# EAGLE board PIC32 (EAGLE 8.1.0)
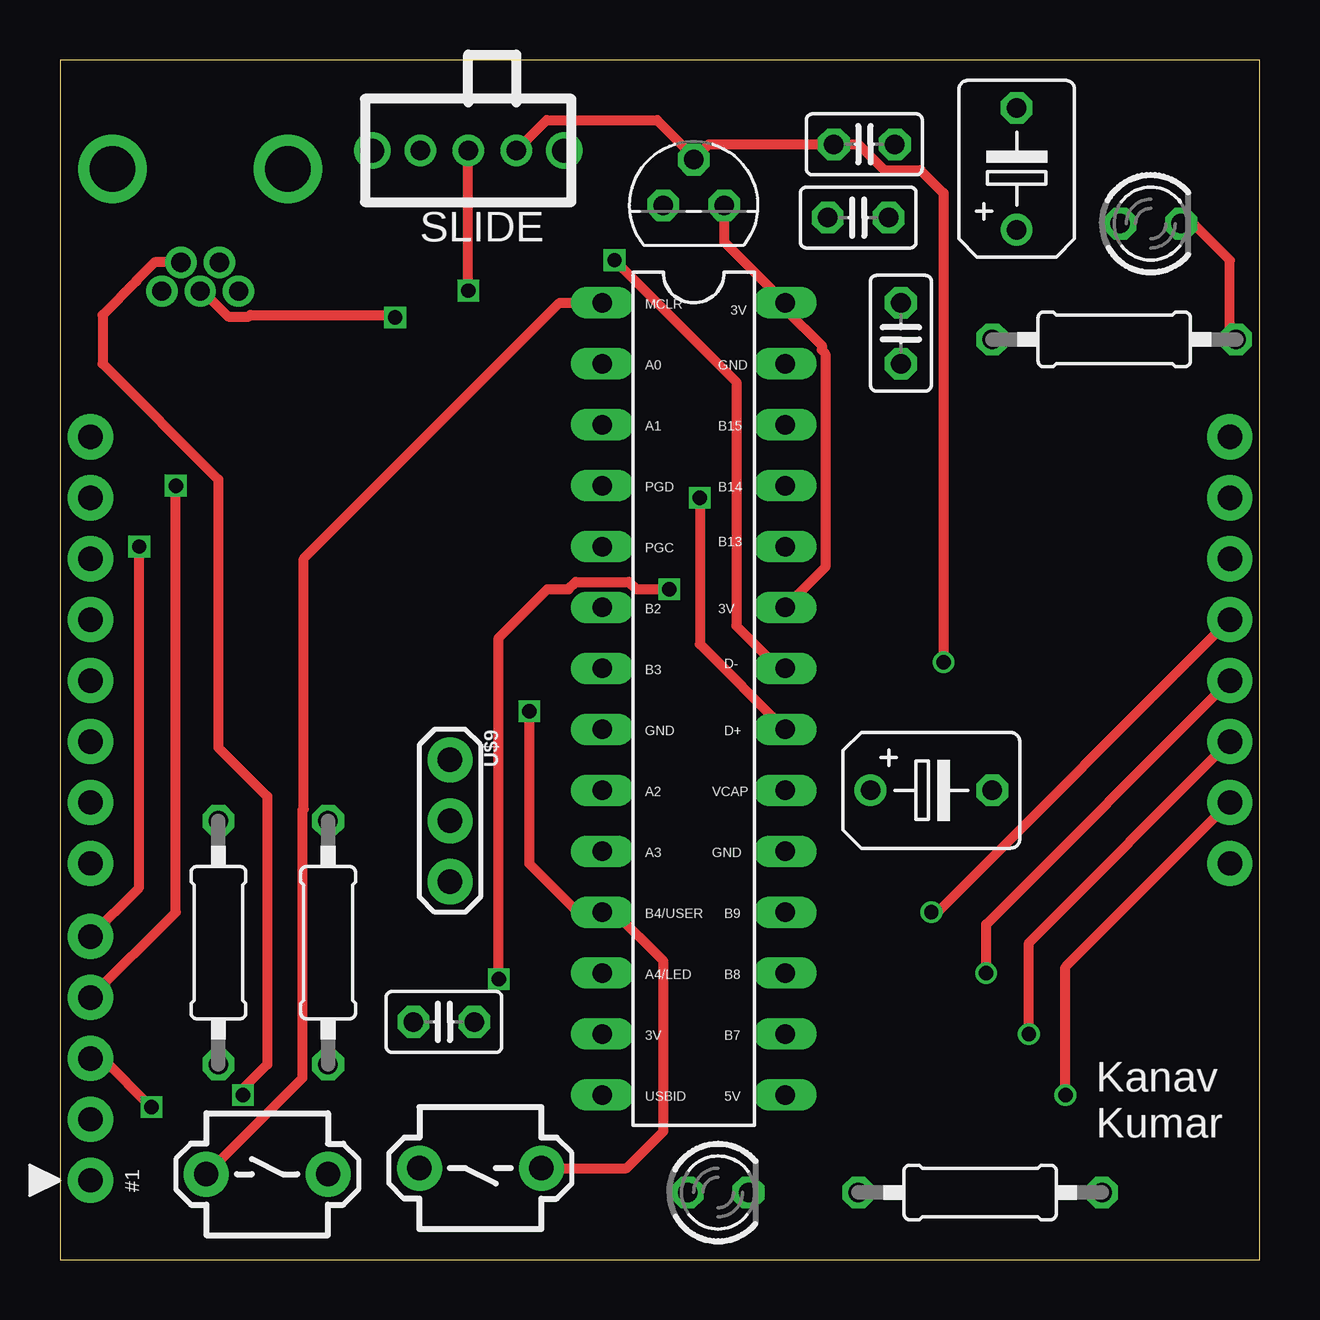
[diagram p0: board, top side]
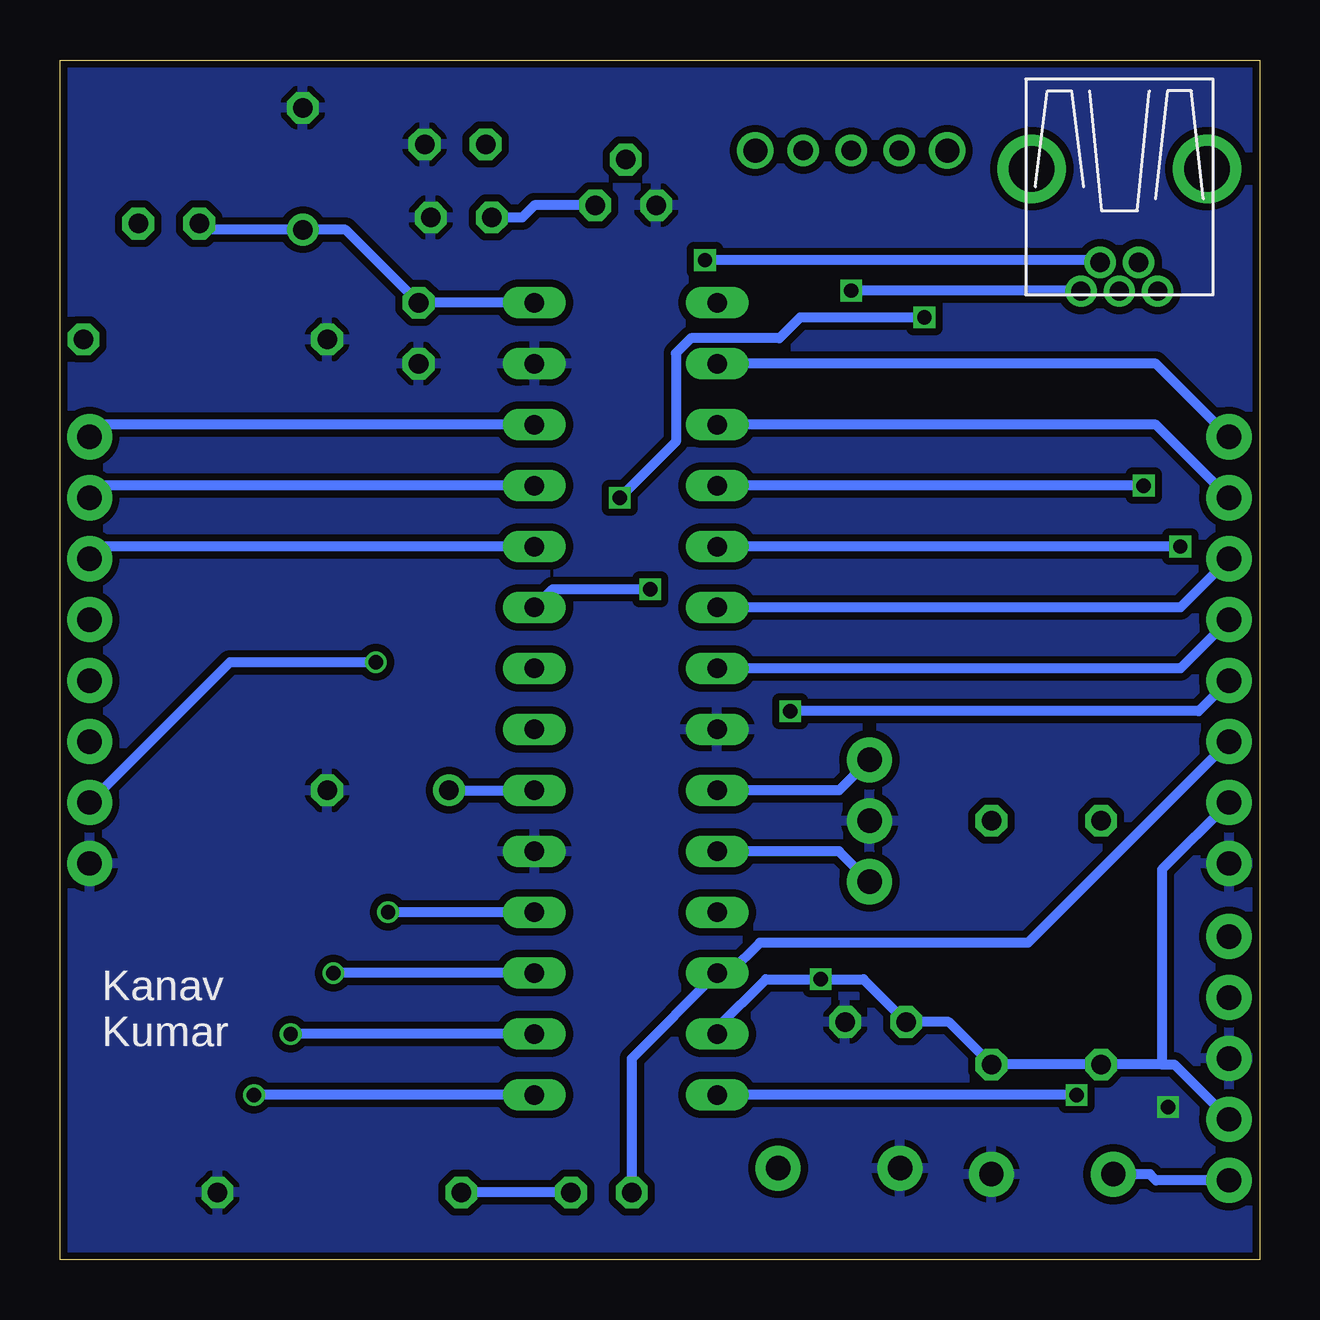
[diagram p1: board, bottom side, seen from below]

Size 50 x 50 mm. Coordinates in mm from the lower left corner, seen from the top.
Outline: 0,0 50,0 50,50 0,50 0,0
Copper layers (1*16): Top 0.035mm / dielectric 1.5mm / Bottom 0.035mm
Design rules "SeeedStudio_2layer_DRU_no_angle_20140221": minimum track width 6mil, minimum drill 12mil, track to track 6mil, track to pad 6mil, pad to pad 6mil, via to via 6mil, smd to smd 0mil, copper to edge 10mil, drill to drill 10mil, minimum pad ring 10mil, minimum via ring 6mil, stop-mask expansion 2mil, vias tented up to drill 100mil, thermal gap 10mil

## Footprints (pad centres in the part's own frame; a part is rotated, then mirrored left to right if it is on the bottom)
C025-025X050 = drill 0.813 octagon: 1 -1.27,0; 2 1.27,0
B45181B = drill 0.813: + -2.54,0 | drill 0.813 octagon: - 2.54,0
USB-MB-H = drill 0.8: D+ 5.1,0; D- 3.9,0.8; GND 5.1,-1.6; ID 3.9,-0.8; VBUS 5.1,1.6 | drill 1.9: P$6 0,-3.65; P$7 0,3.65
LED3MM = drill 0.813 octagon: A -1.27,0; K 1.27,0
0207/10 = drill 0.813 octagon: 1 -5.08,0; 2 5.08,0
DIL28-3 = drill 0.813 long: 1 -16.51,-3.81; 2 -13.97,-3.81; 3 -11.43,-3.81; 4 -8.89,-3.81; 5 -6.35,-3.81; 6 -3.81,-3.81; 7 -1.27,-3.81; 8 1.27,-3.81; 9 3.81,-3.81; 10 6.35,-3.81; 11 8.89,-3.81; 12 11.43,-3.81; 13 13.97,-3.81; 14 16.51,-3.81; 15 16.51,3.81; 16 13.97,3.81; 17 11.43,3.81; 18 8.89,3.81; 19 6.35,3.81; 20 3.81,3.81; 21 1.27,3.81; 22 -1.27,3.81; 23 -3.81,3.81; 24 -6.35,3.81; 25 -8.89,3.81; 26 -11.43,3.81; 27 -13.97,3.81; 28 -16.51,3.81
SLIDE = drill 0.8: 1 -2,0; 2 0,0; 3 2,0 | drill 1: P$1 -4,0; P$2 4,0
TO92 = drill 0.813 octagon: 1 -1.27,0; 2 0,1.905; 3 1.27,0
PB = drill 1.016 pad 1.88: 1 -2.54,0; 2 2.54,0
1X08 = drill 1.016 pad 1.88: 1 0,0; 2 2.54,0; 3 5.08,0; 4 7.62,0; 5 10.16,0; 6 12.7,0; 7 15.24,0; 8 17.78,0
1X05 = drill 1.016 pad 1.88: 1 0,0; 2 2.54,0; 3 5.08,0; 4 7.62,0; 5 10.16,0
OSC = drill 1.016 pad 1.88: 1 -2.54,0; 2 0,0; 3 2.54,0

## Placement (x,y rotation side)
C1  .1uF  [C025-025X050]  35.05,38.61 270 top
C2  .1uF  [C025-025X050]  16,9.91 0 top
C3  .1uF  [C025-025X050]  33.53,46.48 0 top
C4  .1uF  [C025-025X050]  33.27,43.43 0 top
C5  10uF  [B45181B]  36.32,19.56 0 top
C6  10uF  [B45181B]  39.88,45.47 90 top
J1  USB-MB-H  [USB-MB-H]  5.84,45.47 270 top
LED1  RED  [LED3MM]  45.47,43.18 0 top
LED2  GREEN  [LED3MM]  27.43,2.79 0 top
R1  330  [0207/10]  43.94,38.35 0 top
R2  330  [0207/10]  38.35,2.79 180 top
R3  10k  [0207/10]  6.6,13.21 90 top
R4  10k  [0207/10]  11.18,13.21 90 top
U$1  PIC32MX250F128B  [DIL28-3]  26.42,23.37 270 top
U$2  SLIDE  [SLIDE]  17.02,46.23 0 top
U$3  MCP1702  [TO92]  26.42,43.94 0 top
U$4  RESET  [PB]  17.53,3.81 180 top
U$5  USER  [PB]  8.64,3.56 0 top
U$6  CONN_8  [1X08]  48.77,16.51 90 top
U$7  CONN_8  [1X08]  1.27,16.51 90 top
U$8  PICKIT3  [1X05]  1.27,3.3 90 top
U$9  8MHz  [OSC]  16.26,18.29 270 top

## Library data of the parts
C1-C6 J1 R1-R4 U$1-U$9 = ME433
LED1 LED2 = led

## Nets
+3V3: C1.1 C2.1 C4.1 C6.+ LED1.A R3.1 R4.1 U$1.13 U$1.23 U$1.28 U$3.3 U$7.2 U$8.2
+5V: C3.1 U$1.15 U$2.3 U$3.2 U$6.2
A0: U$1.2 U$7.8
A1: U$1.3 U$7.7
A4/LED: LED2.A U$1.12 U$7.3
B2: U$1.6 U$7.6
B3: U$1.7 U$7.5
B4/USER: U$1.11 U$4.1 U$7.4
B7: U$1.16 U$6.3
B8: U$1.17 U$6.4
B9: U$1.18 U$6.5
B13: U$1.24 U$6.6
B14: U$1.25 U$6.7
B15: U$1.26 U$6.8
D+: J1.D+ U$1.21
D-: J1.D- U$1.22
GND: C1.2 C2.2 C3.2 C4.2 C5.- C6.- R1.1 R2.1 U$1.8 U$1.19 U$1.27 U$3.1 U$4.2 U$5.2 U$6.1 U$7.1 U$8.3 U$9.2
MCLR: U$1.1 U$5.1 U$8.1
N$1: J1.GND
N$2: R3.2
N$3: U$1.10 U$9.3
N$4: LED1.K R1.2
N$5: R4.2
N$6: U$1.9 U$9.1
N$7: C5.+ U$1.20
N$8: LED2.K R2.2
PGC: U$1.5 U$8.5
PGD: U$1.4 U$8.4
USBID: J1.ID U$1.14
VBUS: J1.VBUS U$2.2

## Tracks (layer width: path | path; a pad name or v marks a point on that pad's centre or on a via)
+3V3  (via drill 0.6)
  Top 0.406: U$3.3 27.69,42.42 U$1.28 30.23,39.62 31.75,38.1 31.75,37.91 31.9,37.76 31.9,28.85 U$1.23 | v25.4,27.94 24.01,27.94 23.71,28.25 21.5,28.25 21.2,27.94 20.32,27.94 18.29,25.91 v18.29,11.68
  Bottom 0.406: U$3.3 30.23,43.94 30.73,43.43 C4.1 | LED1.A 43.94,42.93 C6.+ 38.1,42.93 C1.1 U$1.28 | U$8.2 3.56,8.13 4.06,8.13 | 4.06,8.13 R3.1 R4.1 12.95,9.91 C2.1 16.51,11.68 v18.29,11.68 20.57,11.68 22.61,9.65 U$1.13 | U$7.2 4.06,16.26 4.06,8.13 | v25.4,27.94 29.46,27.94 U$1.23
+5V  (via drill 0.6)
  Top 0.406: v41.91,6.86 41.91,12.19 U$6.2 | v36.83,24.89 36.83,44.45 35.87,45.41 34.36,45.41 33.29,46.48 C3.1 27.05,46.48 U$3.2 26.42,45.97 24.89,47.5 20.29,47.5 U$2.3
  Bottom 0.406: U$1.15 v41.91,6.86 | v36.83,24.89 42.93,24.89 U$6.2
A0
  Bottom 0.406: U$7.8 4.32,37.34 U$1.2
A1
  Bottom 0.406: U$7.7 4.32,34.8 U$1.3
A4/LED
  Bottom 0.406: LED2.A 26.16,8.38 U$1.12 22.1,11.94 20.83,13.21 9.65,13.21 U$7.3
B2
  Bottom 0.406: U$7.6 3.3,27.18 U$1.6
B3
  Bottom 0.406: U$7.5 3.3,24.64 U$1.7
B4/USER  (via drill 0.6)
  Top 0.406: U$4.1 23.62,3.81 25.15,5.33 25.15,12.45 23.11,14.48 U$1.11 21.59,14.48 19.56,16.51 v19.56,22.86
  Bottom 0.406: U$7.4 2.54,22.86 v19.56,22.86
B7  (via drill 0.6)
  Top 0.406: v40.39,9.4 40.39,13.21 U$6.3
  Bottom 0.406: U$1.16 v40.39,9.4
B8  (via drill 0.6)
  Top 0.406: v38.61,11.94 38.61,13.97 U$6.4
  Bottom 0.406: U$1.17 38.35,11.94 38.61,12.19 v38.61,11.94
B9  (via drill 0.6)
  Top 0.406: v36.32,14.48 36.58,14.48 U$6.5
  Bottom 0.406: U$1.18 v36.32,14.48
B13
  Bottom 0.406: U$1.24 48.26,29.72 U$6.6
B14
  Bottom 0.406: U$1.25 48.26,32.26 U$6.7
B15
  Bottom 0.406: U$1.26 48.26,34.8 U$6.8
D+  (via drill 0.6)
  Top 0.406: J1.D+ 5.94,40.37 7,39.31 7.88,39.31 7.95,39.37 13.97,39.37 v13.97,39.27 | v26.67,31.75 26.67,25.65 U$1.21
  Bottom 0.406: v13.97,39.27 19.15,39.27 20.02,38.41 23.71,38.41 24.33,37.78 24.33,34.09 v26.67,31.75
D-  (via drill 0.6)
  Top 0.406: v23.11,41.66 28.19,36.58 28.19,26.42 29.97,24.64 U$1.22
  Bottom 0.406: J1.D- 6.73,41.66 v23.11,41.66
GND  (via drill 0.6)
  Top 0.406: U$8.3 1.78,8.38 v3.81,6.35
  pour Bottom (isolate 0.305): 0,0 49.78,0 49.78,0.25 50.04,0.25 50.04,49.78 0,49.78
MCLR
  Top 0.406: U$5.1 10.11,7.57 10.11,18.73 10.16,18.78 10.16,29.21 20.83,39.88 U$1.1
  Bottom 0.406: U$8.1 4.32,3.3 4.57,3.56 U$5.1
N$3
  Bottom 0.406: U$9.3 17.53,17.02 U$1.10
N$4
  Top 0.406: R1.2 48.77,38.61 48.77,41.66 47.24,43.18 LED1.K
N$6
  Bottom 0.406: U$9.1 17.53,19.56 U$1.9
N$7
  Bottom 0.406: C5.+ U$1.20
N$8
  Bottom 0.406: LED2.K R2.2
PGC  (via drill 0.6)
  Top 0.406: U$8.5 3.3,15.49 v3.3,29.72
  Bottom 0.406: v3.3,29.72 U$1.5
PGD  (via drill 0.6)
  Top 0.406: U$8.4 4.83,14.48 v4.83,32.26
  Bottom 0.406: v4.83,32.26 U$1.4
USBID  (via drill 0.6)
  Top 0.406: J1.ID 3.94,41.57 3.18,40.8 3.18,40.77 1.78,39.37 1.78,37.34 6.6,32.51 6.6,21.34 8.64,19.3 8.64,8.13 7.37,6.86 v7.62,6.86
  Bottom 0.406: v7.62,6.86 U$1.14
VBUS  (via drill 0.6)
  Top 0.406: v17.02,40.39 U$2.2
  Bottom 0.406: J1.VBUS 7.46,40.39 v17.02,40.39

## Text on the board
tPlace: MCLR | 3V | A0 | GND | A1 | B15 | PGD | B14 | B13 | PGC | B2 | 3V | D- | B3 | GND | D+ | A2 | VCAP | A3 | GND | B4/USER | B9 | A4/LED | B8 | 3V | B7 | USBID | 5V | Kanav / Kumar | #1
bPlace: Kanav / Kumar